# Altium PCB INVERTER_12V_TO_220V_FROM_ATX_POWER_SUPPLY.PcbDoc
Units mil, origin at the board's own origin, x right, y up, seen from the top; angles counter-clockwise.
Board outline 3875 x 1800 mil, 2 copper layers (Top Layer, Bottom Layer); 15 components, 11 nets, 41 pads, 12 vias.
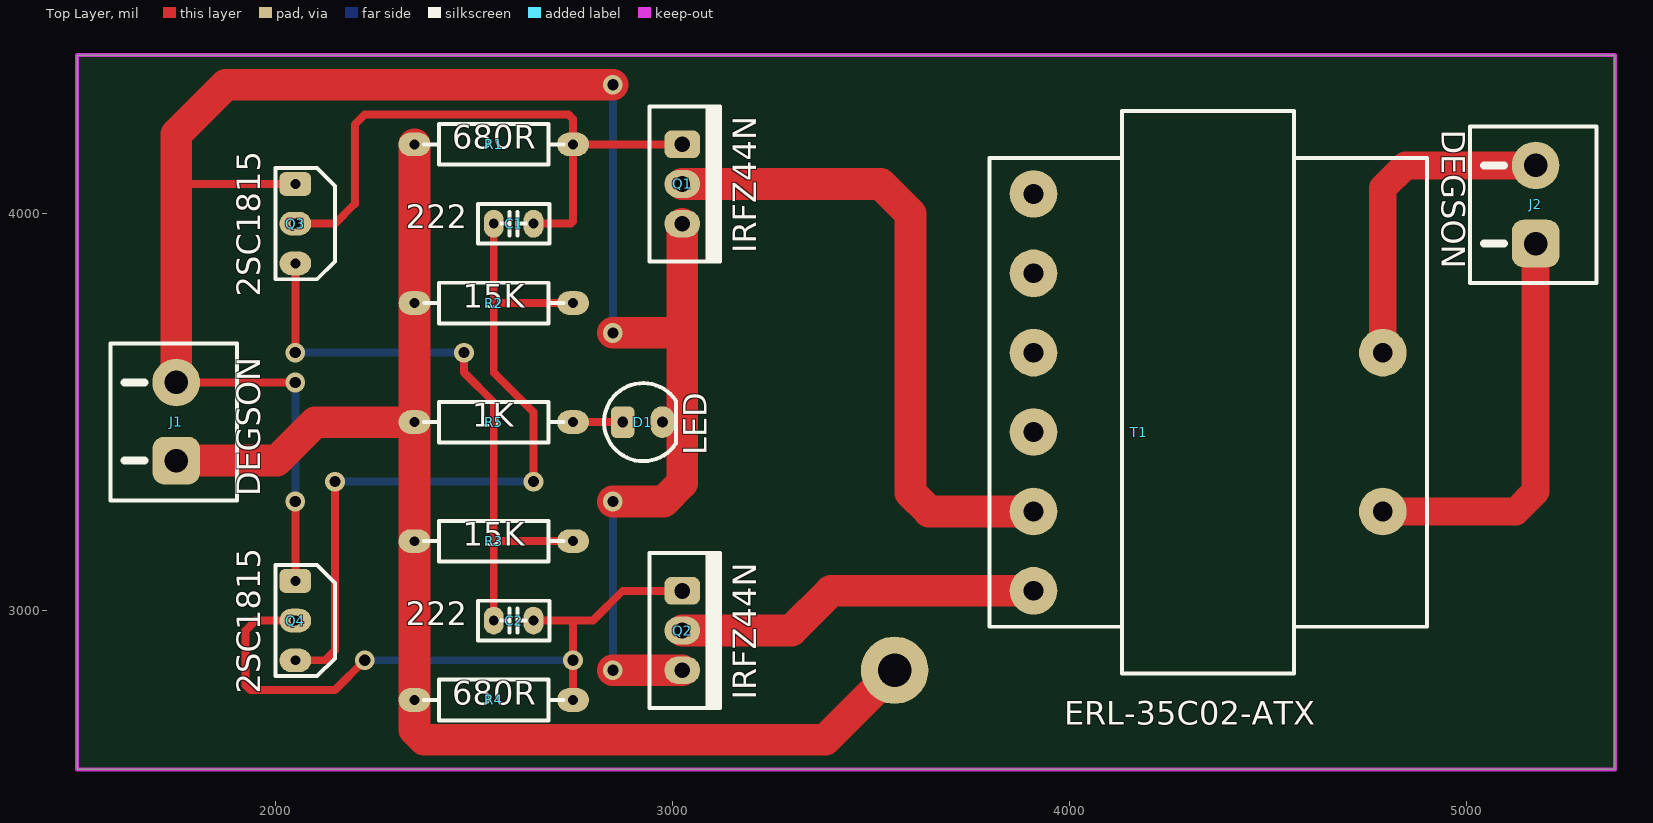
[diagram p0: Top Layer view]
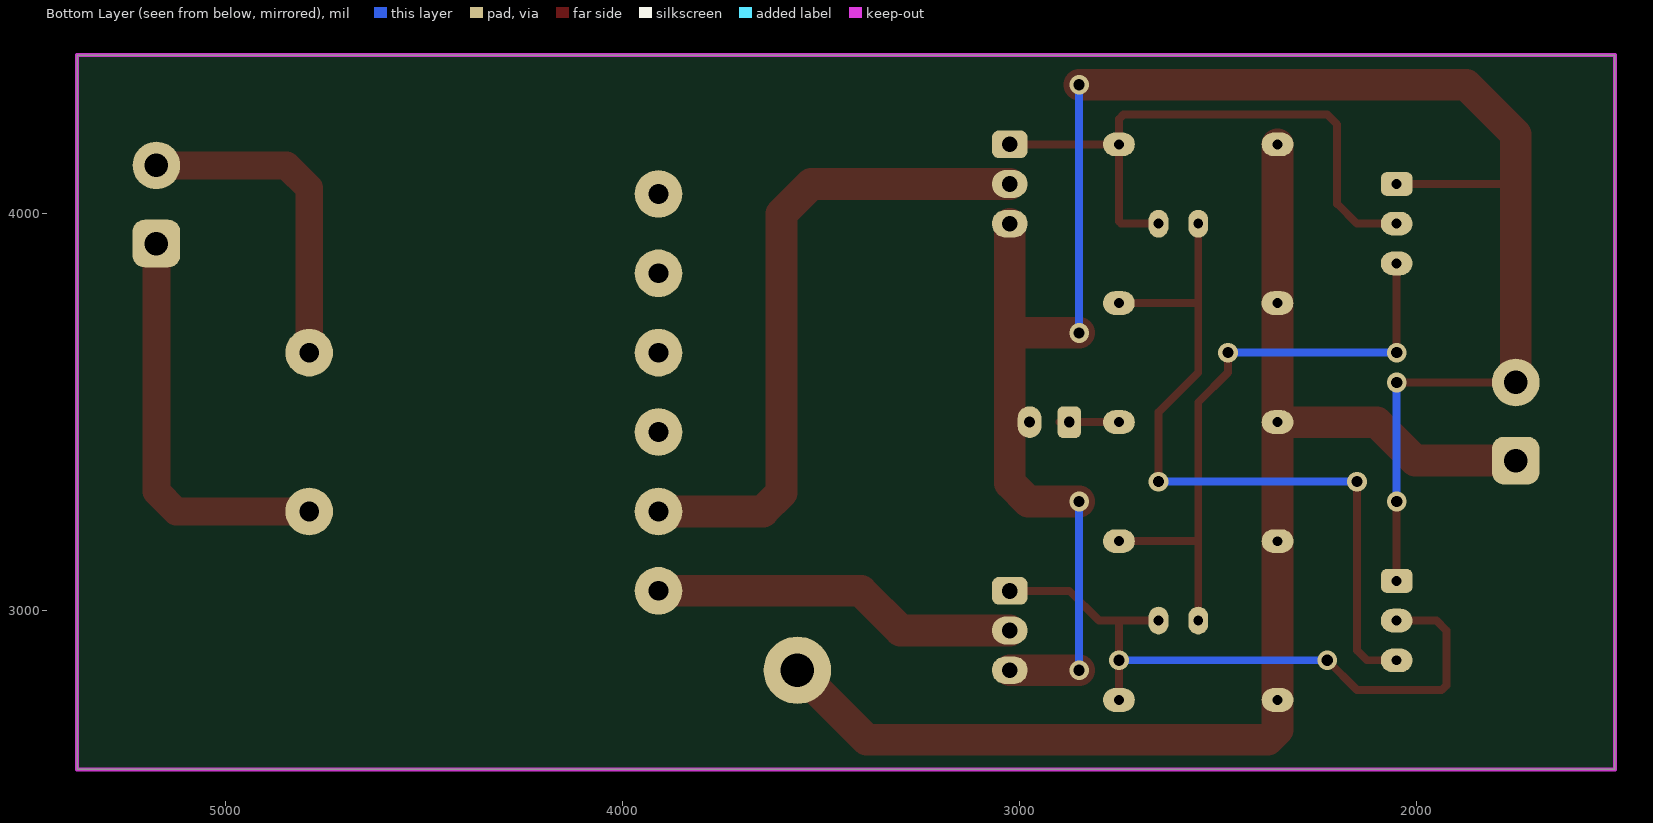
[diagram p1: Bottom Layer view, seen from below]
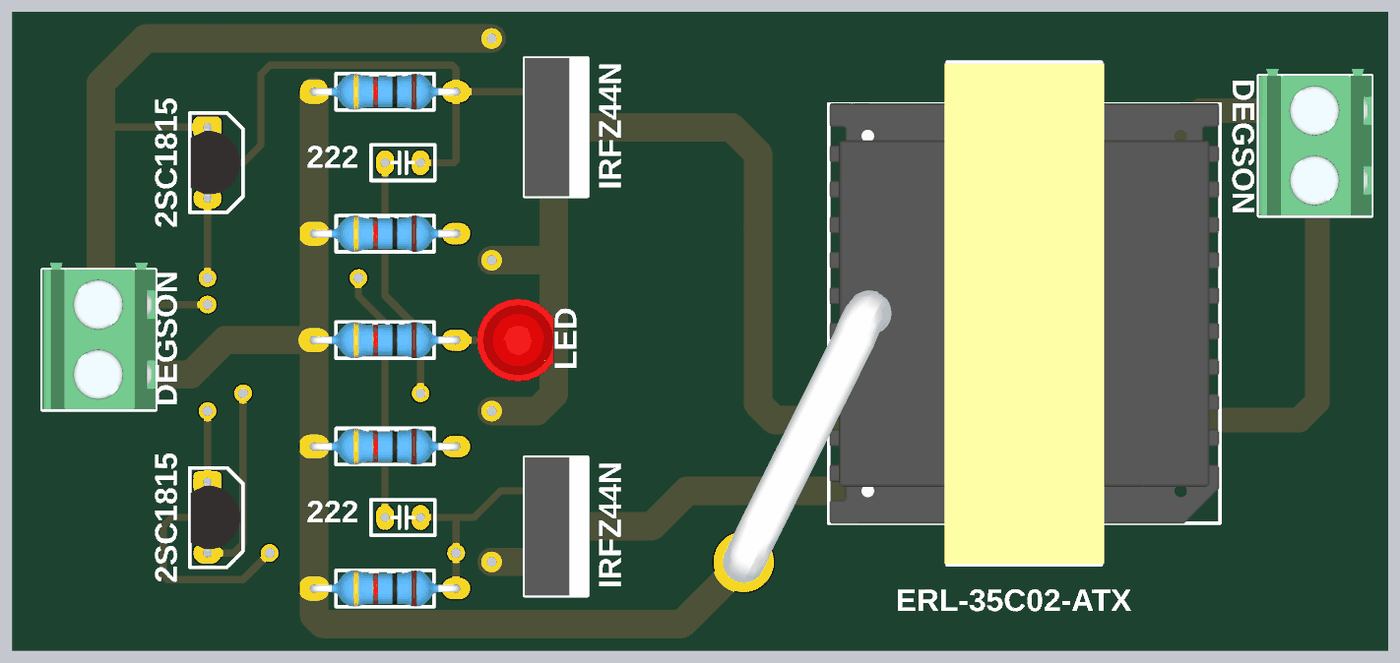
[diagram p2: 3D render of the assembled board from above, using the file's embedded part models]

## Layer stack, top to bottom
Top Solder: solder mask 0.4, Solder Resist, Dk 3.5
Top Layer: signal copper 1.4
Dielectric 1: dielectric 12.6, FR-4, Dk 4.8
Bottom Layer: signal copper 1.4
Bottom Solder: solder mask 0.4, Solder Resist, Dk 3.5

## Board outline
1500,2600 5375,2600 5375,4400 1500,4400

## Design rules (kind name [scope] priority, off if disabled: settings)
Clearance [All] p1: gap=10 ignorepadtopadclearanceinfootprint=FALSE except(0: Arc-Hole Track-Hole SMDPad-Hole THPad-Hole Via-Hole Fill-Hole Poly-Hole Region-Hole Text-Hole)
PolygonConnect [All] p1: connectstyle=Relief reliefconductorwidth=10 reliefentries=4 polygonreliefangle="90 Angle" airgapwidth=10
RoutingVias [All] p1: holewidth=28 width=50 viastyle="Through Hole" minholewidth=28 minwidth=50 maxholewidth=28 maxwidth=50
SolderMaskExpansion [All] p1: expansion=4 istentingtop=FALSE
Width [All] p1: maxlimit=100 minlimit=10 preferedwidth=10
30 further rules are at their usual default settings.

## Components (designator, comment, footprint, x,y, rotation, side; value= is the part's Value field where it differs from the comment)
C1 "222" CAP_Ceramic_Disc_3 2600,3975 r180 top
C2 "222" CAP_Ceramic_Disc_3 2600,2975 r0 top
D1 "LED" LED_5MM 2925,3475 r0 top
J1 "DEGSON" DG127-5.0-02P-14-00AH 1750,3378.15 r90 top
J2 "DEGSON" DG127-5.0-02P-14-00AH 5175,3925 r90 top
Q1 "IRFZ44N" TO-220A 3025,4075 r270 top
Q2 "IRFZ44N" TO-220A 3025,2950 r270 top
Q3 "2SC1815" TO-92 2050,3975 r270 top
Q4 "2SC1815" TO-92 2050,2975 r270 top
R1 "680R" RES-0.25W-H-MF 2550,4175 r180 top
R2 "15K" RES-0.25W-H-MF 2550.2,3774.99 r180 top
R3 "15K" RES-0.25W-H-MF 2550,3175 r180 top
R4 "680R" RES-0.25W-H-MF 2550,2775 r180 top
R5 "1K" RES-0.25W-H-MF 2550,3475 r180 top
T1 "ERL-35C02-ATX" TRANSFORMER-ERL-35C02-ATX 4350,3550 r180 top

## Footprints (in the part's own frame and the unit in brackets; to place one, negate y for a bottom-side part, rotate by r counter-clockwise, add the part's x,y. Pads: shape width x height; smd on the part's side, far side on the other; paste and mask are expansions set on the pad)
CAP_Ceramic_Disc_3 [mil]
  oval 50x70 hole 25: 1(-50,0) 2(50,0)
  silkscreen extent -90,-50 90,50, body extent -92,-49 92,49, height 289
DG127-5.0-02P-14-00AH [mil]
  rrect50% 120x120 hole 59.06: 1(0,0)
  round 120 hole 59.06: 2(196.85,0)
  silkscreen extent -100,-154 295,165, body extent -98,-154 315,165, height 398
LED_5MM [mil]
  rrect50% 60x80 hole 27.56: 1(-50,0)
  oval 60x80 hole 27.56: 2(50,0)
  silkscreen extent -97,-98 84,98, body extent -116,-116 98,116, height 339
RES-0.25W-H-MF [mil]
  oval 80x60 hole 25: 1(-199.8,0) 2(199.8,0.01)
  silkscreen extent -175,-51 175,51, body extent -211,-51 211,51, height 106
TO-92 [mil]
  rrect50% 60x80 hole 25: 1(-100,0)
  oval 60x80 hole 25: 2(0,0) 3(100,0)
  silkscreen extent -140,-50 140,100, body extent -109,-48 109,93, height 298
TO-220A [mil]
  rrect50% 70x90 hole 40: 1(-100,0)
  oval 70x90 hole 40: 2(0,0) 3(100,0)
  silkscreen extent -195,-82 195,95, body extent -195,-82 195,95, height 810
TRANSFORMER-ERL-35C02-ATX [mil]
  round 120 hole 50: 1(-440,300) 2(-440,-100) 3(440,-500) 4(440,-300) 5(440,-100) 6(440,100) 7(440,300) 8(440,500)
  round 170 hole 85: 9(790,700)
  silkscreen extent -551,-709 551,709, body extent -549,-705 849,759, height 1764

## Part data
C1 C2: library part Capacitors(Disc)
D1: library part "LED 5MM"
J1 J2: library part DG127-5.0-02P-14-00AH
Q3 Q4: library part "2SC1815 (TO-92)"
R1 R2 R3 R4 R5: library part "Resistors THD"
T1: library part TRANS-ERL-35C02-ATX

## Via types
v1: diameter 50, hole 28, Top Layer to Bottom Layer, 12 vias

## Nets (pads, with @x,y where several pads share a name; then routed paths per layer and width w, separated by ;. In a path a pad name is that pad's centre, name@x,y a point inside that pad or via, vN(x,y) a via of type N, cw(c..) or ccw(c..) an arc to the next point about the centre after c; other vN are vias at no path point)
+12: J1.1 R1.2 R2.2 R3.2 R4.2 R5.2 T1.9 | length 3408.2
  Top Layer w80: J1.1 2003.16,3378.15 2100,3474.99 R5.2 ; R1.2 2350.3,4174.89 2350.3,3775.08 R2.2 2350.3,3774.89 2350.3,2775.09 R4.2 2350.2,2699.8 2375,2675 3385,2675 T1.9
GND: D1.2 J1.2 Q1.3 Q2.3 Q3.1 Q4.1 | length 5195
  Top Layer w20: J1.2 v1(2050,3575) ; 1750,4075 Q3.1 ; Q4.1 v1(2050,3275) ; D1.2 3025,3425
  Top Layer w80: J1.2 1750,4075 1750,4200 1875,4325 v1(2850,4325) ; v1(2850,2850) Q2.3 ; v1(2850,3275) 2978.14,3275 3025,3321.86 3025,3425 3025,3700 ; v1(2850,3700) 3025,3700 ; Q1.3 3025,3700
  Bottom Layer w20: v1(2050,3275) v1(2050,3575) ; v1(2850,2850) v1(2850,3275) ; v1(2850,3700) v1(2850,4325)
NetC1_1: C1.1 Q1.1 Q3.2 R1.1 | length 1570.9
  Top Layer w20: Q3.2 2150,3975 2200,4025 2200,4225 2225,4250 2738.09,4250 2749.8,4238.28 R1.1 ; C1.1 2744.14,3975 2750,3980.86 2750,4174.8 R1.1 ; Q1.1 R1.1
NetC1_2: C1.2 Q4.3 R2.1 | length 1926.8
  Top Layer w20: Q4.3 2125,2875 2150,2900 v1(2150,3325) ; C1.2 2550,3774.99 ; v1(2650,3325) 2650,3500 2550,3600 2550,3774.99 ; R2.1 2550,3774.99
  Bottom Layer w20: v1(2150,3325) v1(2650,3325)
NetC2_1: C2.1 Q3.3 R3.1 | length 1555.9
  Top Layer w20: v1(2050,3650) Q3.3 ; v1(2475,3650) 2475,3600 2550,3525 2550,3175 ; C2.1 2550,3175 ; R3.1 2550,3175
  Bottom Layer w20: v1(2050,3650) v1(2475,3650)
NetC2_2: C2.2 Q2.1 Q4.2 R4.1 | length 1740.6
  Top Layer w20: Q4.2 1950,2975 1925,2950 1925,2811.72 1936.72,2800 2150,2800 v1(2225,2875) ; C2.2 2749.8,2975 ; R4.1 2749.8,2975 ; Q2.1 2875,3050 2800,2975 2749.8,2975
  Bottom Layer w20: v1(2225,2875) v1(2750,2875)
NetD1_1: D1.1 R5.1 | length 150.2
  Top Layer w20: R5.1 D1.1@2900,3475
NetJ2_1: J2.1 T1.1 | length 1030.7
  Top Layer w70: T1.1 5125,3250 5175,3300 J2.1
NetJ2_2: J2.2 T1.2 | length 823.5
  Top Layer w70: T1.2 4790,4065 4846.85,4121.85 J2.2
NetQ1_2: Q1.2 T1.7 | length 1638.6
  Top Layer w80: Q1.2 3525,4075 3600,4000 3600,3296.86 3646.86,3250 T1.7
NetQ2_2: Q2.2 T1.8 | length 926.4
  Top Layer w80: Q2.2 3300,2950 3400,3050 T1.8
pads on no net: T1.3 T1.4 T1.5 T1.6

## Keep-outs
Keep-Out Layer:
  lines w10: 1500,2600 1500,4400 5375,4400 5375,2600 1600,2600 1500,2600